# EAGLE board CT_schematic (EAGLE 7.6.0)

Size 100 x 80 mm. Coordinates in mm from the lower left corner, seen from the top.
Outline: 0,0 100,0 100,80 0,80 0,0
Copper layers (1*16): Top 0.035mm / dielectric 1.5mm / Bottom 0.035mm
Design rules "default": minimum track width 10mil, minimum drill 24mil, track to track 8mil, track to pad 8mil, pad to pad 8mil, via to via 8mil, smd to smd 8mil, copper to edge 40mil, drill to drill 8mil, minimum pad ring 10mil, minimum via ring 8mil, stop-mask expansion 4mil, vias tented up to drill 0mil, thermal gap 10mil

## Footprints (pad centres in the part's own frame; a part is rotated, then mirrored left to right if it is on the bottom)
C0603 = smd 0.8 x 0.8: 1 -0.762,0; 2 0.762,0
C0402 = smd 0.5 x 0.5: 1 -0.508,0; 2 0.508,0
C1210 = smd 1.2 x 2.5: 1 -1.524,0; 2 1.524,0
C0805 = smd 1.2 x 1.3: 1 -1.016,0; 2 1.016,0
2220 = smd 1.85 x 5.5: 1 -2.55,0; 2 2.55,0
EXV-9H = smd 3.505 x 1.676: 1 -2.857,0; 2 2.857,0
L0603 = smd 0.8 x 0.8: 1 -0.762,0; 2 0.762,0
L1210 = smd 1.2 x 2.5: 1 -1.524,0; 2 1.524,0
DR1040 = smd 1.6 x 3.2: 1 -4.458,0; 2 4.458,0
PJ-037B_PACKAGE = drill 3.7 square: 1 12,0 | drill 3.2 square: 2 6,0
R0603 = smd 0.8 x 0.8: 1 -0.762,0; 2 0.762,0
WLCSP100 = smd 0.229 x 0.229: A1 -1.8,1.8; A2 -1.4,1.8; A3 -1,1.8; A4 -0.6,1.8; A5 -0.2,1.8; A6 0.2,1.8; A7 0.6,1.8; A8 1,1.8; A9 1.4,1.8; A10 1.8,1.8; B1 -1.8,1.4; B2 -1.4,1.4; B3 -1,1.4; B4 -0.6,1.4; B5 -0.2,1.4; B6 0.2,1.4; B7 0.6,1.4; B8 1,1.4; B9 1.4,1.4; B10 1.8,1.4; C1 -1.8,1; C2 -1.4,1; C3 -1,1; C4 -0.6,1; C5 -0.2,1; C6 0.2,1; C7 0.6,1; C8 1,1; C9 1.4,1; C10 1.8,1; D1 -1.8,0.6; D2 -1.4,0.6; D3 -1,0.6; D4 -0.6,0.6; D5 -0.2,0.6; D6 0.2,0.6; D7 0.6,0.6; D8 1,0.6; D9 1.4,0.6; D10 1.8,0.6; E1 -1.8,0.2; E2 -1.4,0.2; E3 -1,0.2; E4 -0.6,0.2; E5 -0.2,0.2; E6 0.2,0.2; E7 0.6,0.2; E8 1,0.2; E9 1.4,0.2; E10 1.8,0.2; F1 -1.8,-0.2; F2 -1.4,-0.2; F3 -1,-0.2; F4 -0.6,-0.2; F5 -0.2,-0.2; F6 0.2,-0.2; F7 0.6,-0.2; F8 1,-0.2; F9 1.4,-0.2; F10 1.8,-0.2; G1 -1.8,-0.6; G2 -1.4,-0.6; G3 -1,-0.6; G4 -0.6,-0.6; G5 -0.2,-0.6; G6 0.2,-0.6; G7 0.6,-0.6; G8 1,-0.6; G9 1.4,-0.6; G10 1.8,-0.6; H1 -1.8,-1; H2 -1.4,-1; H3 -1,-1; H4 -0.6,-1; H5 -0.2,-1; H6 0.2,-1; H7 0.6,-1; H8 1,-1; H9 1.4,-1; H10 1.8,-1; J1 -1.8,-1.4; J2 -1.4,-1.4; J3 -1,-1.4; J4 -0.6,-1.4; J5 -0.2,-1.4; J6 0.2,-1.4; J7 0.6,-1.4; J8 1,-1.4; J9 1.4,-1.4; J10 1.8,-1.4; K1 -1.8,-1.8; K2 -1.4,-1.8; K3 -1,-1.8; K4 -0.6,-1.8; K5 -0.2,-1.8; K6 0.2,-1.8; K7 0.6,-1.8; K8 1,-1.8; K9 1.4,-1.8; K10 1.8,-1.8
A2200-A = smd 1.5 x 0.8: 1 -4.85,6.35; 2 -4.85,5.08; 3 -4.85,3.81; 4 -4.85,2.54; 5 -4.85,1.27; 6 -4.85,0; 7 -4.85,-1.27; 8 -4.85,-2.54; 9 -4.85,-3.81; 10 -4.85,-5.08; 11 -4.85,-6.35; 12 4.85,-6.35; 13 4.85,-5.08; 14 4.85,-3.81; 15 4.85,-2.54; 16 4.85,-1.27; 17 4.85,0; 18 4.85,1.27; 19 4.85,2.54; 20 4.85,3.81; 21 4.85,5.08; 22 4.85,6.35 | smd 1.2 x 1.2: 23 -2,2; 24 -2,0; 25 -2,-2; 26 0,-2; 27 0,0; 28 0,2; 29 2,2; 30 2,0; 31 2,-2
COAXIAL_C = smd 1 x 1: 1 0,-1.5; 2 0,1.5 | smd 1.05 x 2.2: 3 -1.475,0; 4 1.475,0
TST-110-05-T-D-RA = drill 1 pad 1.7 square: 1 0,0 | drill 1 pad 1.7: 2 0,2.54; 3 2.54,0; 4 2.54,2.54; 5 5.08,0; 6 5.08,2.54; 7 7.62,0; 8 7.62,2.54; 9 10.16,0; 10 10.16,2.54; 11 12.7,0; 12 12.7,2.54; 13 15.24,0; 14 15.24,2.54; 15 17.78,0; 16 17.78,2.54; 17 20.32,0; 18 20.32,2.54; 19 22.86,0; 20 22.86,2.54
SSOP-16 = smd 1.981 x 0.356: 1 -2.464,2.223; 2 -2.464,1.587; 3 -2.464,0.953; 4 -2.464,0.318; 5 -2.464,-0.318; 6 -2.464,-0.953; 7 -2.464,-1.587; 8 -2.464,-2.223; 9 2.464,-2.223; 10 2.464,-1.587; 11 2.464,-0.953; 12 2.464,-0.318; 13 2.464,0.318; 14 2.464,0.953; 15 2.464,1.587; 16 2.464,2.223
HTSS-105-01-G-D = drill 1 pad 1.8 square: 1 0,0 | drill 1 pad 1.8: 2 0,2.54; 3 2.54,0; 4 2.54,2.54; 5 5.08,0; 6 5.08,2.54; 7 7.62,0; 8 7.62,2.54; 9 10.16,0; 10 10.16,2.54
QFN-32 = smd 0.6 x 0.3: 1 -2.3,1.75; 2 -2.3,1.25; 3 -2.3,0.75; 4 -2.3,0.25; 5 -2.3,-0.25; 6 -2.3,-0.75; 7 -2.3,-1.25; 8 -2.3,-1.75; 17 2.3,-1.75; 18 2.3,-1.25; 19 2.3,-0.75; 20 2.3,-0.25; 21 2.3,0.25; 22 2.3,0.75; 23 2.3,1.25; 24 2.3,1.75 | smd 0.3 x 0.6: 9 -1.75,-2.3; 10 -1.25,-2.3; 11 -0.75,-2.3; 12 -0.25,-2.3; 13 0.25,-2.3; 14 0.75,-2.3; 15 1.25,-2.3; 16 1.75,-2.3; 25 1.75,2.3; 26 1.25,2.3; 27 0.75,2.3; 28 0.25,2.3; 29 -0.25,2.3; 30 -0.75,2.3; 31 -1.25,2.3; 32 -1.75,2.3 | smd 3.2 x 3.2: EXP 0,0
SJ-43515TS-SMT-TR = smd 2.2 x 3: 1 0.6,-7.4; 4 3.4,-7.4 | smd 3 x 3: 2 12.8,-7.4; 5 17,-3 | smd 2 x 3: 3 5.3,0; 6 2.5,0 | drill 1.8: P$7 4.5,-3.69; P$8 11.54,-3.69
WM-64PC = drill 0.6 pad 1: 1 -1,0.95; 2 -1,-0.95
ABS07-32.768KHZ-7-T = smd 1.1 x 2.4: 1 -2.5,0; 2 0,0
ASFL1 = smd 1.7 x 1.5: 1 -1.27,-1.1; 2 1.27,-1.1; 3 1.27,1.1; 4 -1.27,1.1
WSON-8 = smd 0.3 x 0.6: 1 -0.75,0; 2 0.05,0; 3 0.85,0; 4 1.65,0; 5 1.65,3.8; 6 0.85,3.8; 7 0.05,3.8; 8 -0.75,3.8 | smd 3 x 2.6: PAD 0.45,1.9
QFN-16_EP = smd 0.805 x 0.3: 1 -1.452,0.75; 2 -1.452,0.25; 3 -1.452,-0.25; 4 -1.452,-0.75; 9 1.452,-0.75; 10 1.452,-0.25; 11 1.452,0.25; 12 1.452,0.75 | smd 0.3 x 0.805: 5 -0.75,-1.452; 6 -0.25,-1.452; 7 0.25,-1.452; 8 0.75,-1.452; 13 0.75,1.452; 14 0.25,1.452; 15 -0.25,1.452; 16 -0.75,1.452 | smd 1.55 x 1.55: 17 0,0
SON-6 = smd 0.55 x 0.3: 1 -0.355,0.5 | smd 0.52 x 0.3: 2 -0.37,0; 3 -0.37,-0.5; 4 0.37,-0.5; 5 0.37,0; 6 0.37,0.5
SW_4-1437565-2 = smd 1.4 x 2.1: 1 -2.23,4.55; 2 -2.23,-4.55; 3 2.23,4.55; 4 2.23,-4.55
LGM67K-G1J2-24-Z = smd 0.8 x 1.4: A -2,0; C 0,0
NC7SZ125M5X = smd 1.3 x 0.7: 1 -1.3,0.95; 2 -1.3,0; 3 -1.3,-0.95; 4 1.3,-0.95; 5 1.3,0.95

## Placement (x,y rotation side)
C1  1e-06  [C0603]  -82.55,72.39 0 top  (outside the outline)
C2  1e-07  [C0603]  -15.24,77.47 0 top  (outside the outline)
C3  1e-07  [C0603]  -19.05,77.47 0 top  (outside the outline)
C4  1e-07  [C0603]  -22.86,77.47 0 top  (outside the outline)
C5  1e-07  [C0603]  -26.67,77.47 0 top  (outside the outline)
C6  1e-07  [C0603]  -30.48,77.47 0 top  (outside the outline)
C7  1e-07  [C0603]  -34.29,77.47 0 top  (outside the outline)
C8  1e-07  [C0603]  -38.1,77.47 0 top  (outside the outline)
C9  1e-07  [C0603]  -41.91,77.47 0 top  (outside the outline)
C10  4.7e-06  [C0603]  -74.93,72.39 0 top  (outside the outline)
C11  1e-08  [C0603]  -45.72,77.47 0 top  (outside the outline)
C12  1e-06  [C0603]  -49.53,77.47 0 top  (outside the outline)
C13  1e-11  [C0402]  -80.01,82.55 0 top  (outside the outline)
C14  1e-11  [C0402]  -83.82,82.55 0 top  (outside the outline)
C15  1e-07  [C0402]  -15.24,87.63 0 top  (outside the outline)
C16  1e-07  [C0402]  -19.05,87.63 0 top  (outside the outline)
C17  1e-06  [C0603]  -53.34,77.47 0 top  (outside the outline)
C18  1e-06  [C0603]  -57.15,77.47 0 top  (outside the outline)
C19  2.2e-07  [C0603]  -78.74,72.39 0 top  (outside the outline)
C20  1e-06  [C0603]  -60.96,77.47 0 top  (outside the outline)
C21  1e-06  [C0603]  -64.77,77.47 0 top  (outside the outline)
C22  1e-06  [C0603]  -68.58,77.47 0 top  (outside the outline)
C23  1e-06  [C0603]  -72.39,77.47 0 top  (outside the outline)
C24  1e-06  [C0603]  -76.2,77.47 0 top  (outside the outline)
C25  1e-06  [C0603]  -80.01,77.47 0 top  (outside the outline)
C26  1e-06  [C0603]  -83.82,77.47 0 top  (outside the outline)
C27  1e-06  [C0603]  -15.24,82.55 0 top  (outside the outline)
C28  1e-06  [C0603]  -19.05,82.55 0 top  (outside the outline)
C29  1e-07  [C0402]  -22.86,87.63 0 top  (outside the outline)
C30  1e-07  [C0402]  -26.67,87.63 0 top  (outside the outline)
C31  1e-07  [C0402]  -30.48,87.63 0 top  (outside the outline)
C32  1e-07  [C0402]  -34.29,87.63 0 top  (outside the outline)
C33  1e-06  [C0603]  -22.86,82.55 0 top  (outside the outline)
C34  1e-08  [C0402]  -38.1,87.63 0 top  (outside the outline)
C35  1e-08  [C0402]  -41.91,87.63 0 top  (outside the outline)
C36  1e-08  [C0402]  -45.72,87.63 0 top  (outside the outline)
C37  1e-05  [C1210]  -48.26,66.04 0 top  (outside the outline)
C38  1e-05  [C0805]  -78.74,64.77 0 top  (outside the outline)
C39  1e-05  [C0805]  -83.82,64.77 0 top  (outside the outline)
C40  1e-06  [C0603]  -26.67,82.55 0 top  (outside the outline)
C41  1e-07  [C0402]  -49.53,87.63 0 top  (outside the outline)
C42  6.8e-05  [2220]  -82.55,39.37 0 top  (outside the outline)
C43  1e-07  [C0402]  -53.34,87.63 0 top  (outside the outline)
C44  0.0001  [EXV-9H]  -54.61,58.42 0 top  (outside the outline)
C45  0.0001  [EXV-9H]  -66.04,58.42 0 top  (outside the outline)
C46  1e-08  [C0402]  -57.15,87.63 0 top  (outside the outline)
C47  1e-08  [C0402]  -60.96,87.63 0 top  (outside the outline)
C48  1e-08  [C0402]  -64.77,87.63 0 top  (outside the outline)
F1  240.0  [L0603]  -30.48,82.55 0 top  (outside the outline)
I1  1e-05  [L1210]  -54.61,66.04 0 top  (outside the outline)
I2  7e-06  [DR1040]  -82.55,25.4 0 top  (outside the outline)
J1  PJ-037B  [PJ-037B_PACKAGE]  -55.88,26.67 0 top  (outside the outline)
R2  1000.0  [R0603]  -34.29,82.55 0 top  (outside the outline)
R4  4700.0  [R0603]  -38.1,82.55 0 top  (outside the outline)
R5  4700.0  [R0603]  -41.91,82.55 0 top  (outside the outline)
R6  2200.0  [R0603]  -45.72,82.55 0 top  (outside the outline)
R7  2200.0  [R0603]  -49.53,82.55 0 top  (outside the outline)
R8  10000.0  [R0603]  -40.64,72.39 0 top  (outside the outline)
R9  10000.0  [R0603]  -45.72,72.39 0 top  (outside the outline)
R10  10000.0  [R0603]  -50.8,72.39 0 top  (outside the outline)
R11  100000.0  [R0603]  -15.24,72.39 0 top  (outside the outline)
R12  1270.0  [R0603]  -53.34,82.55 0 top  (outside the outline)
R13  1270.0  [R0603]  -57.15,82.55 0 top  (outside the outline)
R14  100000.0  [R0603]  -20.32,72.39 0 top  (outside the outline)
R15  200.0  [R0603]  -60.96,82.55 0 top  (outside the outline)
R16  1000.0  [R0603]  -64.77,82.55 0 top  (outside the outline)
R17  20000.0  [R0603]  -55.88,72.39 0 top  (outside the outline)
R18  91000.0  [R0603]  -60.96,72.39 0 top  (outside the outline)
R19  300000.0  [R0603]  -25.4,72.39 0 top  (outside the outline)
R20  10000.0  [R0603]  -66.04,72.39 0 top  (outside the outline)
R21  10000.0  [R0603]  -71.12,72.39 0 top  (outside the outline)
R22  9100.0  [R0603]  -68.58,82.55 0 top  (outside the outline)
R23  680000.0  [R0603]  -30.48,72.39 0 top  (outside the outline)
R24  120000.0  [R0603]  -35.56,72.39 0 top  (outside the outline)
U1  STM32F303VCY6TR  [WLCSP100]  -71.12,48.26 0 top  (outside the outline)
U2  A2200-A  [A2200-A]  -19.05,10.16 0 top  (outside the outline)
U3  73412-0114  [COAXIAL_C]  -83.82,49.53 0 top  (outside the outline)
U4  TST-110-05-T-D-RA  [TST-110-05-T-D-RA]  -46.99,55.88 0 top  (outside the outline)
U5  LTC2804CGN-1#PBF  [SSOP-16]  -29.21,39.37 0 top  (outside the outline)
U6  HTSS-105-01-G-D  [HTSS-105-01-G-D]  -74.93,38.1 0 top  (outside the outline)
U7  SGTL5000XNAA3  [QFN-32]  -54.61,39.37 0 top  (outside the outline)
U8  SJ-43515TS-SMT-TR  [SJ-43515TS-SMT-TR]  -52.07,10.16 0 top  (outside the outline)
U9  SJ-43515TS-SMT-TR  [SJ-43515TS-SMT-TR]  -80.01,10.16 0 top  (outside the outline)
U10  SJ-43515TS-SMT-TR  [SJ-43515TS-SMT-TR]  -39.37,29.21 0 top  (outside the outline)
U11  WM-64PCT  [WM-64PC]  -40.64,39.37 0 top  (outside the outline)
U12  ABS07-32.768KHZ-7-T  [ABS07-32.768KHZ-7-T]  -27.94,66.04 0 top  (outside the outline)
U13  ASFL-24.57MHZ-NCS  [ASFL1]  -48.26,49.53 0 top  (outside the outline)
U14  ASFL1-25MHZ-NCS  [ASFL1]  -64.77,49.53 0 top  (outside the outline)
U15  LP3878SDX-ADJ/NOPB  [WSON-8]  -30.48,48.26 0 top  (outside the outline)
U16  LTC3601EUD#PBF  [QFN-16_EP]  -73.66,82.55 0 top  (outside the outline)
U17  TPS3895ADRYR  [SON-6]  -67.31,86.36 0 top  (outside the outline)
U18  4-1437565-2  [SW_4-1437565-2]  -72.39,25.4 0 top  (outside the outline)
U19  Q65110A2395  [LGM67K-G1J2-24-Z]  -36.83,66.04 0 top  (outside the outline)
U20  nc7sz125m5x  [NC7SZ125M5X]  -59.69,64.77 0 top  (outside the outline)
U21  nc7sz125m5x  [NC7SZ125M5X]  -66.04,64.77 0 top  (outside the outline)
U22  nc7sz125m5x  [NC7SZ125M5X]  -72.39,64.77 0 top  (outside the outline)

## Library data of the parts
C1-C48 F1 I1 I2 J1 R2 R4-R24 U1-U22 = circuit_tree

## Nets
CLK_CRYSTAL_U1_C10: C13.1 U1.C10 U12.1
CLK_CRYSTAL_U1_D9: C14.1 U1.D9 U12.2
CLK_U1_F10: U1.F10 U14.3
CLK_U7_21: U7.21 U13.3
GND: C1.2 C2.2 C3.2 C4.2 C5.2 C6.2 C7.2 C8.2 C9.2 C10.2 C11.2 C12.2 C13.2 C14.2 C15.2 C16.2 C17.2 C18.2 C20.2 C21.2 C29.2 C30.2 C31.2 C32.2 C33.2 C34.2 C35.2 C36.2 C37.2 C38.2 C39.2 C40.2 C42.1 C42.2 C43.2 C44.2 C45.2 C46.2 C47.2 C48.2 J1.2 R2.2 R8.2 R13.2 R16.2 R17.2 R19.2 R22.2 R24.2 U1.A1 U1.A2 U1.B1 U1.C7 U1.H8 U1.J1 U1.K1 U1.K2 U1.K9 U1.K10 U2.7 U2.8 U2.23 U2.24 U2.25 U2.26 U2.27 U2.28 U2.29 U2.30 U2.31 U4.4 U4.6 U4.8 U4.10 U4.12 U4.14 U4.16 U4.18 U4.20 U5.8 U6.9 U7.1 U7.3 U7.7 U7.EXP U9.1 U10.1 U11.2 U13.2 U14.2 U15.3 U15.PAD U16.1 U16.9 U16.17 U17.2 U19.C U20.2 U20.3 U21.1 U21.3 U22.1 U22.3
NET_U1_A7: R8.1 U1.A7
NET_U1_B2: R6.1 U1.B2 U2.15
NET_U1_C5: R7.1 U1.C5 U2.16
NET_U1_E9: R5.1 U1.E9 U22.4
NET_U1_J10: C11.1 C12.1 F1.1 U1.J8 U1.J10
NET_U1_K6: U19.A
NET_U1_K7: U18.3 U18.4
NET_U2_2: R9.2 U2.2
NET_U2_6: U2.6
NET_U2_17: R9.1 U2.17
NET_U2_19: U2.19
NET_U2_22: R4.1 U2.22 U21.4
NET_U3_1: U2.11 U3.1
NET_U3_2: U2.10 U3.2 U3.3 U3.4
NET_U5_6: C17.1 U5.6
NET_U5_7: C19.1 I1.2 U5.7
NET_U5_9: C18.1 U5.9
NET_U5_10: C19.2 U5.10
NET_U5_11: R11.1 U5.11
NET_U6_3: U5.1 U6.3
NET_U6_4: U5.2 U6.4
NET_U6_5: U5.3 U6.5
NET_U6_6: U5.4 U6.6
NET_U7_10: C32.1 U7.10
NET_U7_29: R12.1 U7.29
NET_U7_31: R13.1 U7.31
NET_U8_1: U7.4 U8.1
NET_U8_2: U7.2 U8.2
NET_U8_5: U7.6 U8.5
NET_U9_2: C23.1 U9.2
NET_U9_5: C22.1 U9.5
NET_U9_11: C23.2
NET_U9_12: C22.2
NET_U10_2: C25.1 C26.1 U10.2
NET_U10_5: C24.1 U10.5
NET_U10_13: C25.2 C26.2
NET_U10_14: C24.2
NET_U11_1: C27.1 C28.1 C33.1 U7.16 U11.1
NET_U11_15: C27.2 C28.2
NET_U15_1: C36.1 U15.1
NET_U15_6: R15.2 R16.1 U15.6
NET_U15_8: R14.1 U15.8
NET_U16_3: C41.2 I2.1 U16.3 U16.4
NET_U16_6: C41.1 U16.6
NET_U16_7: C40.1 U16.7 U16.12
NET_U16_10: R19.1 U16.10
NET_U16_11: R17.1 R18.1 U16.11
NET_U16_14: U16.14
NET_U16_ATNET_3: I2.2 R18.2
NET_U17_1: R21.1 R22.1 U17.1
NET_U17_3: R23.2 R24.1 U17.3
NET_U17_4: R20.1 U17.4 U20.4 U21.2 U22.2
NET_U18_1: R2.1 U18.1 U18.2
PROC_I2S2_CK: U1.J3 U7.24
PROC_I2S2_EXT_SD: U1.J2 U7.25
PROC_I2S2_SD: U1.H4 U7.26
PROC_I2S2_WS: U1.J4 U7.23
PROC_SYS_JTCK_SWCLK: U1.C2 U4.9
PROC_SYS_JTDO_TRACESWO: U1.A5 U4.13
PROC_SYS_JTMS_SWDIO: U1.E3 U4.7
PROC_UART4_RX: U1.D3 U5.16
PROC_UART4_TX: U1.E4 U5.14
RST_OUT_U4_SRESET_B: R10.1 U4.15 U20.1
VCC_S1_12V5: C37.1 C39.1 C44.1 C45.1 J1.1 R14.2 U15.4 U16.15 U16.16
VCC_TIER1_1V2: C29.1 C38.1 R15.1 U7.30 U15.5
VCC_TIER1_3V3: C1.1 C2.1 C3.1 C4.1 C5.1 C6.1 C7.1 C8.1 C9.1 C10.1 C15.1 C16.1 C20.1 C21.1 C30.1 C31.1 C34.1 C35.1 C42.2 C43.1 C46.1 C47.1 C48.1 F1.2 I1.1 I2.2 R4.2 R5.2 R6.2 R7.2 R10.2 R11.2 R12.2 R18.2 R20.2 R21.2 R23.1 U1.A9 U1.A10 U1.B8 U1.B10 U1.D2 U1.D8 U1.J5 U1.K8 U2.20 U4.1 U5.5 U5.12 U7.5 U7.20 U13.4 U14.4 U16.8 U17.6 U20.5 U21.5 U22.5

## Tracks (layer width: path | path; a pad name or v marks a point on that pad's centre or on a via)
CLK_CRYSTAL_U1_C10  (2 unrouted)
CLK_CRYSTAL_U1_D9  (2 unrouted)
CLK_U1_F10  (1 unrouted)
CLK_U7_21  (1 unrouted)
GND  (102 unrouted)
NET_U1_A7  (1 unrouted)
NET_U1_B2  (2 unrouted)
NET_U1_C5  (2 unrouted)
NET_U1_E9  (2 unrouted)
NET_U1_J10  (4 unrouted)
NET_U1_K7  (1 unrouted)
NET_U2_2  (1 unrouted)
NET_U2_17  (1 unrouted)
NET_U2_22  (2 unrouted)
NET_U3_1  (1 unrouted)
NET_U3_2  (3 unrouted)
NET_U5_6  (1 unrouted)
NET_U5_7  (2 unrouted)
NET_U5_9  (1 unrouted)
NET_U5_10  (1 unrouted)
NET_U5_11  (1 unrouted)
NET_U6_3  (1 unrouted)
NET_U6_4  (1 unrouted)
NET_U6_5  (1 unrouted)
NET_U6_6  (1 unrouted)
NET_U7_10  (1 unrouted)
NET_U7_29  (1 unrouted)
NET_U7_31  (1 unrouted)
NET_U8_1  (1 unrouted)
NET_U8_2  (1 unrouted)
NET_U8_5  (1 unrouted)
NET_U9_2  (1 unrouted)
NET_U9_5  (1 unrouted)
NET_U10_2  (2 unrouted)
NET_U10_5  (1 unrouted)
NET_U10_13  (1 unrouted)
NET_U11_1  (4 unrouted)
NET_U11_15  (1 unrouted)
NET_U15_1  (1 unrouted)
NET_U15_6  (2 unrouted)
NET_U15_8  (1 unrouted)
NET_U16_3  (3 unrouted)
NET_U16_6  (1 unrouted)
NET_U16_7  (2 unrouted)
NET_U16_10  (1 unrouted)
NET_U16_11  (2 unrouted)
NET_U16_ATNET_3  (1 unrouted)
NET_U17_1  (2 unrouted)
NET_U17_3  (2 unrouted)
NET_U17_4  (4 unrouted)
NET_U18_1  (2 unrouted)
PROC_I2S2_CK  (1 unrouted)
PROC_I2S2_EXT_SD  (1 unrouted)
PROC_I2S2_SD  (1 unrouted)
PROC_I2S2_WS  (1 unrouted)
PROC_SYS_JTCK_SWCLK  (1 unrouted)
PROC_SYS_JTDO_TRACESWO  (1 unrouted)
PROC_SYS_JTMS_SWDIO  (1 unrouted)
PROC_UART4_RX  (1 unrouted)
PROC_UART4_TX  (1 unrouted)
RST_OUT_U4_SRESET_B  (2 unrouted)
VCC_S1_12V5  (8 unrouted)
VCC_TIER1_1V2  (4 unrouted)
VCC_TIER1_3V3  (57 unrouted)